# Altium PCB AP2-H.PcbDoc (part 1 of 4)
Units mm, origin at the board's own origin, x right, y up, seen from the top; angles counter-clockwise.
Board outline 380 x 190 mm, 2 copper layers (Top Layer, Bottom Layer); 519 components, 519 nets, 1666 pads, 438 vias.
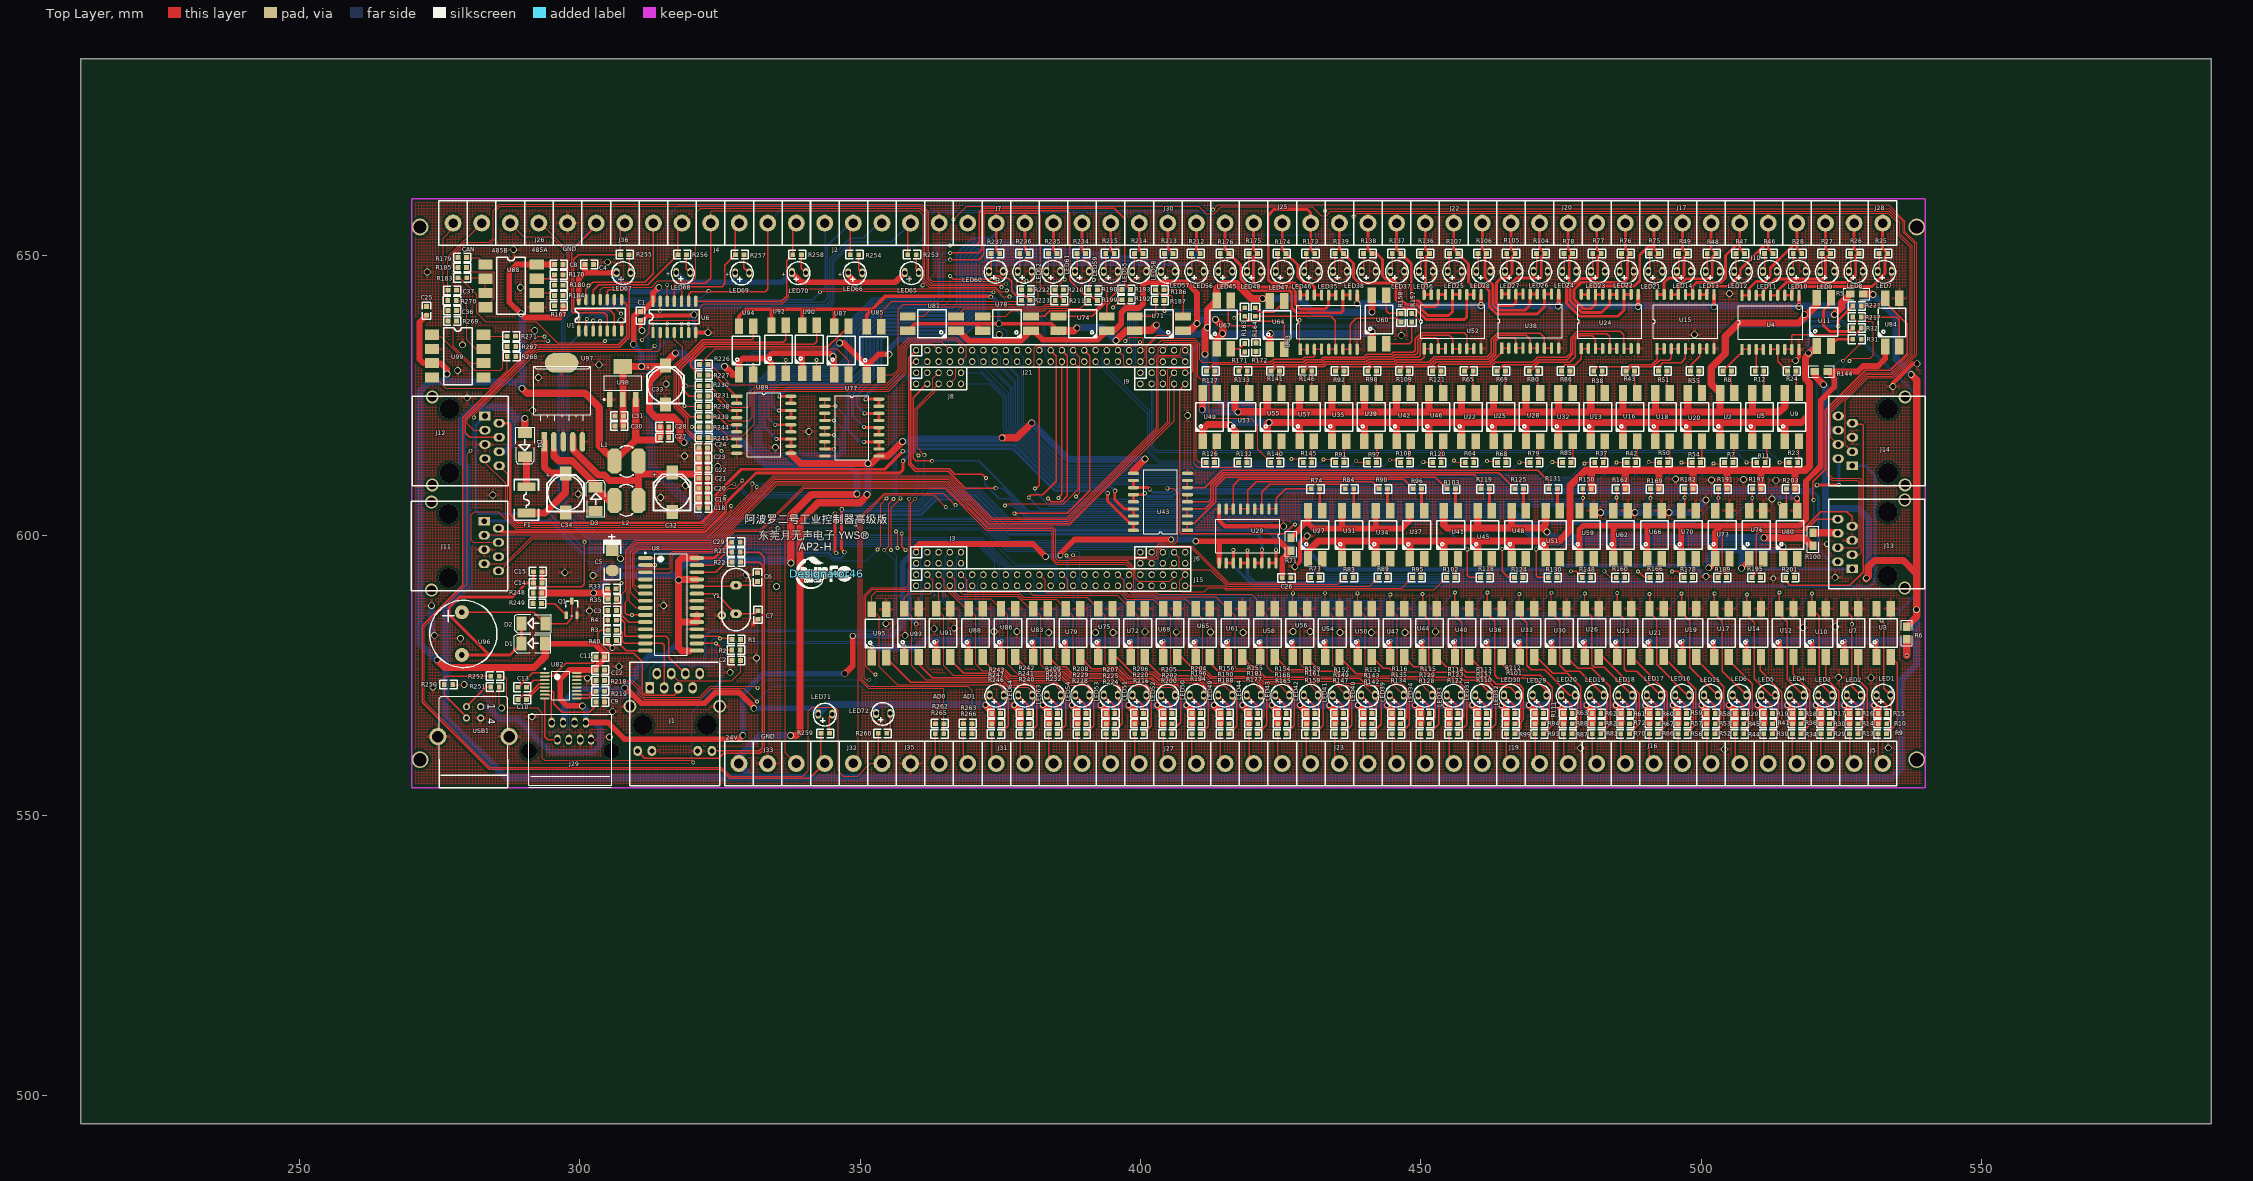
[diagram p0: Top Layer view]
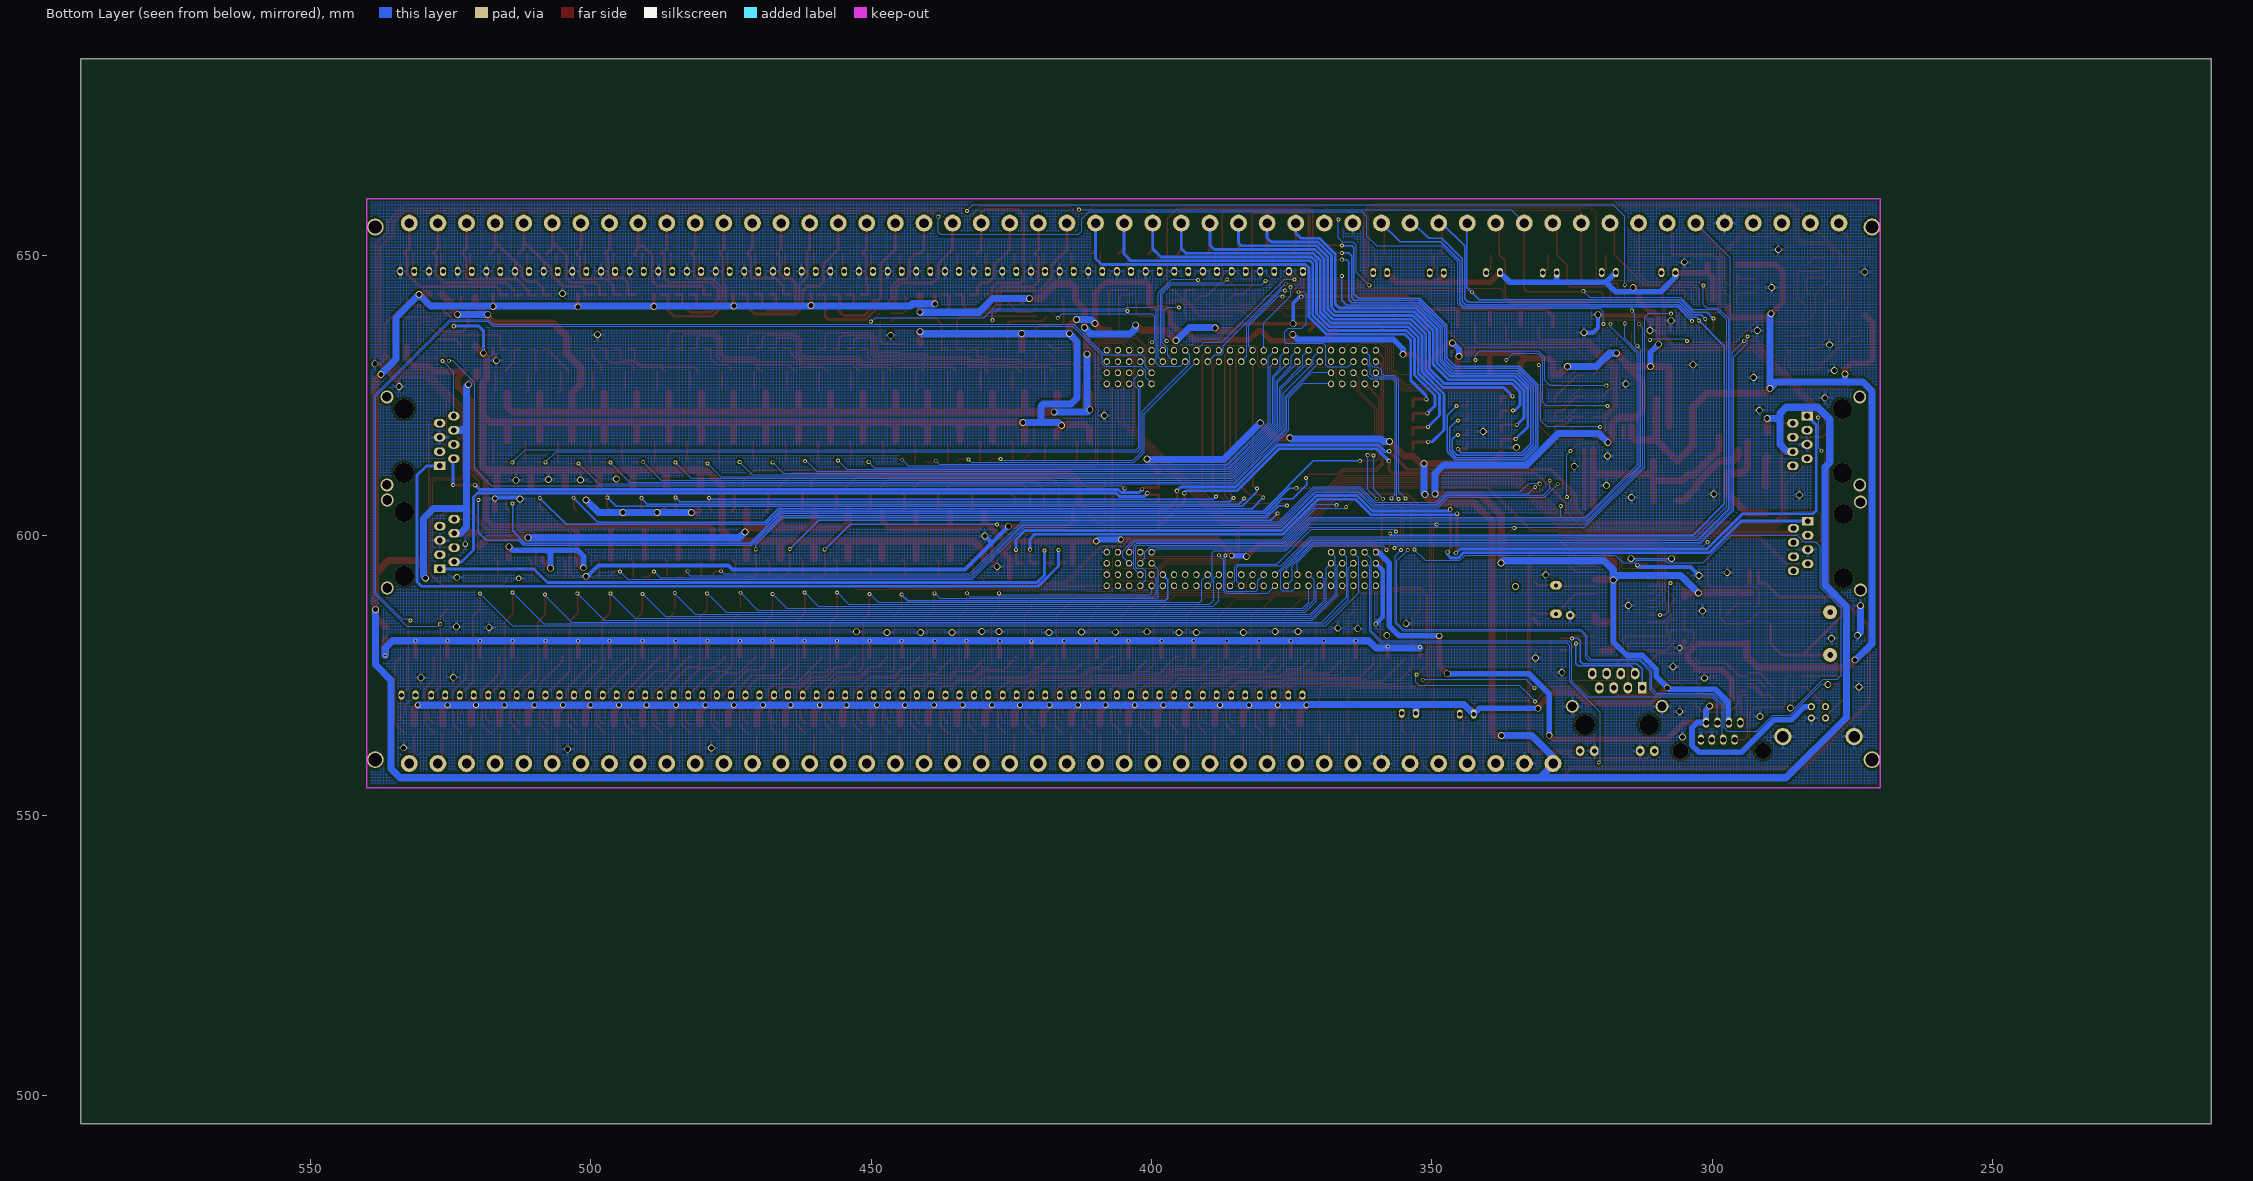
[diagram p1: Bottom Layer view, seen from below]

## Layer stack, top to bottom
Top Layer: signal copper 0.0356
Dielectric: dielectric 0.32, FR-4, Dk 4.8
Bottom Layer: signal copper 0.0356

## Board outline
211,495 591,495 591,685 211,685 211,495

## Design rules (kind name [scope] priority, off if disabled: settings)
Clearance [All] p1: gap=0.16
ComponentClearance [All] p1: gap=0 collisioncheckmode=3 verticalgap=0 showdistances=FALSE
PlaneConnect [All] p1: planeconnectstyle=Relief reliefexpansion=0.508 reliefentries=4 reliefconductorwidth=0.508 reliefairgap=0.508
PolygonConnect [All] p1: connectstyle=Relief reliefconductorwidth=0.508 reliefentries=4 polygonreliefangle="90 Angle" airgapwidth=0.254
RoutingVias [All] p1: holewidth=0.4 width=0.7 viastyle="Through Hole" minholewidth=0.4 minwidth=0.7 maxholewidth=1.2 maxwidth=1.5
SilkToSolderMaskClearance SilkscreenOverComponentPads [IsPad] p1: minsilkscreentomaskgap=0.254 clearancetoexposedcopper=TRUE
SolderMaskExpansion [All] p1: expansion=0.102
Width [All] p1: maxlimit=1.778 minlimit=0.16 preferedwidth=0.254
25 further rules are at their usual default settings.

## Components (designator, comment, footprint, x,y, rotation, side; value= is the part's Value field where it differs from the comment)
C1 "104" 0603 310.82,639.902 r270 top
C2 "103" 0603 328.7,577.647 r180 top
C3 "103" 0603 305,586.624 r0 top
C4 "104" 0603 300.914,648.31 r0 top
C5 "10UF" 胆电容 305.8,597.3 r90 top
C6 "22p" 0603 331.724,591.795 r90 top
C7 "22p" 0603 331.8,586.562 r270 top
C8 "CAP" 0603 297.011,648.31 r180 top
C9 "104" 0603 302.9,570.3 r0 top
C10 "104" 0603 290.5,570.7 r180 top
C11 "104" 0603 302.9,578.283 r0 top
C12 "CAP" 0603 302.9,576 r0 top
C13 "104" 0603 289,572.9 r0 top
C14 "104" 0603 291.77,591.515 r0 top
C15 "104" 0603 291.77,593.515 r0 top
C18 "104" 0603 322.783,604.85 r180 top
C19 "104" 0603 322.788,606.632 r180 top
C20 "104" 0603 322.788,608.405 r180 top
C21 "104" 0603 322.788,610.178 r180 top
C22 "104" 0603 322.788,611.978 r180 top
C23 "104" 0603 322.788,613.776 r180 top
C24 "104" 0603 322.788,615.575 r180 top
C25 "104" 0603 272.669,639.267 r90 top
C26 "104" 0603 425.298,592.43 r0 top
C27 "104" 0603 314.35,617.468 r0 top
C28 "14" 0603 314.35,619.368 r0 top
C29 "104" 0603 327.101,598.78 r0 top
C30 "104" 0603 307.78,619.478 r180 top
C31 "104" 0603 307.78,621.278 r180 top
C32 "220UF/25V" 固态电容 316.509,607.67 r90 top
C33 "470UF" 固态电容 315.29,626.796 r90 top
C34 "680UF/50V" 固态电容 297.485,607.568 r90 top
C36 "30P" 0603 278.003,640.08 r180 top
C37 "30P" 0603 278.003,643.712 r180 top
CAN "CON2" CON2*5 282.499,655.701 r0 top (schematic designator J24)
D1 "5819" 贴片二极管 288.29,580.746 r180 top
D2 "4148" 贴片二极管 288.315,584.327 r180 top
D3 "IN5824" 贴片二极管 302.88,609.878 r90 top
D4 "5817" 贴片二极管 290.17,612.724 r270 top
Designator46 "Comment" fc 344.043,593.166 r0 top
F1 "3A" 自恢复保险丝 290.474,608.686 r270 top
J1 "HR911105A" HR911105A 312.5,572.8 r270 top
J2 "CON4" CON4*5 343.7,655.7 r180 top
J3 "DIP10" DIP2.0-10 360,597 r0 top
J4 "CON4" CON4*5 323.342,655.701 r180 top
J5 "CON6" CON6*5 532.4,559.3 r0 top
J6 "DIP10" DIP2.0-10 400,597 r0 top
J7 "CON6" CON6*5 389.6,655.7 r0 top
J8 "DIP10" DIP2.0-10 360,629 r0 top
J9 "DIP10" DIP2.0-10 400,629 r0 top
J10 "CON4" CON4*5 512,655.7 r0 top
J11 "CON8" 立式RJ45 282.956,602.539 r180 top
J12 "CON8" 立式RJ45 283.083,621.284 r180 top
J13 "CON8" 立式RJ45 526.948,594.004 r0 top
J14 "CON8" 立式RJ45 526.999,612.394 r0 top
J15 "DIP25X2" DIP2.0-50 360,593 r0 top
J16 "CON6" CON6*5 501.8,559.3 r0 top
J17 "CON4" CON4*5 491.6,655.7 r0 top
J19 "CON6" CON6*5 471.2,559.3 r0 top
J20 "CON4" CON4*5 471.2,655.7 r0 top
J21 "DIP25X2" DIP2.0-50 360,633 r0 top
J22 "CON4" CON4*5 450.8,655.7 r0 top
J23 "CON6" CON6*5 440.6,559.3 r0 top
J25 "CON4" CON4*5 430.4,655.7 r0 top
J26 "CON3" CON3*5 287.602,655.702 r180 top
J27 "CON6" CON6*5 410,559.3 r0 top
J28 "CON4" CON4*5 532.4,655.7 r0 top
J29 "CON8" OD-RJ45 295,566.6 r0 top
J30 "CON4" CON4*5 410,655.7 r0 top
J31 "CON2" CON2*5 379.4,559.3 r0 top
J32 "CON4" CON4*5 338.607,559.308 r180 top
J33 "CON2" CON2*5 333.5,559.3 r0 top
J35 "CON3" CON3*5 359,559.3 r180 top
J36 "CON4" CON4*5 318.237,655.701 r0 top
L1 "100UH" SMD-48 309.58,613.278 r0 top
L2 "33UH" SMD-48 307.08,606.178 r180 top
LED1 "LED" LED2.5 531.3,571.5 r180 top
LED2 "LED" LED2.5 526,571.5 r180 top
LED3 "LED" LED2.5 520.906,571.5 r180 top
LED4 "LED" LED2.5 515.81,571.5 r180 top
LED5 "LED" LED2.5 510.713,571.5 r180 top
LED6 "LED" LED2.5 505.616,571.5 r180 top
LED7 "LED" LED2.5 531.5,647.1 r180 top
LED8 "LED" LED2.5 526.387,647.1 r180 top
LED9 "LED" LED2.5 521.274,647.1 r180 top
LED10 "LED" LED2.5 516.161,647.1 r180 top
LED11 "LED" LED2.5 511.048,647.1 r180 top
LED12 "LED" LED2.5 505.935,647.1 r180 top
LED13 "LED" LED2.5 500.823,647.1 r180 top
LED14 "LED" LED2.5 495.71,647.1 r180 top
LED15 "LED" LED2.5 500.519,571.5 r180 top
LED16 "LED" LED2.5 495.423,571.5 r180 top
LED17 "LED" LED2.5 490.326,571.5 r180 top
LED18 "LED" LED2.5 485.229,571.5 r180 top
LED19 "LED" LED2.5 480.132,571.5 r180 top
LED20 "LED" LED2.5 475.035,571.5 r180 top
LED21 "LED" LED2.5 490.597,647.1 r180 top
LED22 "LED" LED2.5 485.484,647.1 r180 top
LED23 "LED" LED2.5 480.371,647.1 r180 top
LED24 "LED" LED2.5 475.258,647.1 r180 top
LED25 "LED" LED2.5 454.806,647.1 r180 top
LED26 "LED" LED2.5 470.145,647.1 r180 top
LED27 "LED" LED2.5 465.032,647.1 r180 top
LED28 "LED" LED2.5 459.919,647.1 r180 top
LED29 "LED" LED2.5 469.939,571.5 r180 top
LED30 "LED" LED2.5 464.842,571.5 r180 top
LED31 "LED" LED2.5 454.648,571.5 r180 top
LED32 "LED" LED2.5 459.745,571.5 r180 top
LED33 "LED" LED2.5 449.552,571.5 r180 top
LED34 "LED" LED2.5 444.455,571.5 r180 top
LED35 "LED" LED2.5 434.355,647.1 r180 top
LED36 "LED" LED2.5 449.694,647.1 r180 top
LED37 "LED" LED2.5 444.581,647.1 r180 top
LED38 "LED" LED2.5 439.468,647.1 r180 top
LED39 "LED" LED2.5 439.358,571.5 r180 top
LED40 "LED" LED2.5 434.261,571.5 r180 top
LED41 "LED" LED2.5 429.165,571.5 r180 top
LED42 "LED" LED2.5 424.068,571.5 r180 top
LED43 "LED" LED2.5 418.971,571.5 r180 top
LED44 "LED" LED2.5 413.874,571.5 r180 top
LED45 "LED" LED2.5 413.903,647.1 r180 top
LED46 "LED" LED2.5 429.242,647.1 r180 top
LED47 "LED" LED2.5 424.129,647.1 r180 top
LED48 "LED" LED2.5 419.016,647.1 r180 top
LED49 "LED" LED2.5 408.777,571.5 r180 top
LED50 "LED" LED2.5 403.681,571.5 r180 top
LED51 "LED" LED2.5 393.487,571.5 r180 top
LED52 "LED" LED2.5 398.584,571.5 r180 top
LED53 "LED" LED2.5 388.39,571.5 r180 top
LED54 "LED" LED2.5 383.294,571.5 r180 top
LED55 "LED" LED2.5 393.452,647.1 r180 top
LED56 "LED" LED2.5 408.79,647.1 r180 top
LED57 "LED" LED2.5 403.677,647.1 r180 top
LED58 "LED" LED2.5 398.565,647.1 r180 top
LED59 "LED" LED2.5 383.226,647.1 r180 top
LED60 "LED" LED2.5 373,647.1 r180 top
LED61 "LED" LED2.5 388.339,647.1 r180 top
LED62 "LED" LED2.5 378.113,647.1 r180 top
LED63 "LED" LED2.5 378.197,571.5 r180 top
LED64 "LED" LED2.5 373.1,571.5 r180 top
LED65 "LED" LED2.5 357.988,646.862 r180 top
LED66 "LED" LED2.5 347.878,646.811 r180 top
LED67 "LED" LED2.5 306.557,646.862 r180 top
LED68 "LED" LED2.5 317.195,646.887 r180 top
LED69 "LED" LED2.5 327.711,646.811 r180 top
LED70 "LED" LED2.5 337.845,646.862 r180 top
LED71 "LED" LED2.5 342.544,568.122 r180 top
LED72 "LED" LED2.5 352.857,568.249 r180 top
Q1 "9013" SOT23 297.612,585.749 r0 top
R1 "50/1%" 0603 328.7,581.447 r180 top
R2 "50/1%" 0603 327.1,579.547 r0 top
R3 "50/1%" 0603 305.024,583.075 r0 top
R4 "50/1%" 0603 306.524,584.849 r180 top
R5 "NC" 0805 526.644,643.026 r0 top
R6 "0" 0805 536.702,581.431 r90 top
R7 "51" 0603 504.163,613 r0 top
R8 "15K" 0603 505.426,629.3 r180 top
R9 "2.4k" 0603 533.1,564.6 r180 top
R10 "4.7k" 0603 531.6,566.4 r0 top
R11 "51" 0603 509.942,613 r0 top
R12 "15K" 0603 511.184,629.3 r180 top
R13 "2.4k" 0603 528.023,564.6 r180 top
R14 "4.7k" 0603 526.5,566.4 r0 top
R15 "160R" 0603 531.6,568.2 r0 top
R16 "160R" 0603 526.5,568.2 r0 top
R17 "160R" 0603 521.4,568.2 r0 top
R18 "160R" 0603 516.3,568.2 r0 top
R19 "160R" 0603 511.2,568.2 r0 top
R20 "160R" 0603 506.1,568.2 r0 top
R21 "1k" 0603 327.101,597.027 r0 top
R22 "1k" 0603 327.127,595.249 r0 top
R23 "51" 0603 515.721,613 r0 top
R24 "15K" 0603 516.942,629.3 r180 top
R25 "2.4K" 0603 533.3,650.3 r180 top
R26 "2.4k" 0603 528.19,650.3 r180 top
R27 "2.4K" 0603 523.081,650.3 r180 top
R28 "2.4K" 0603 517.971,650.3 r180 top
R29 "2.4k" 0603 522.922,564.6 r180 top
R30 "4.7k" 0603 521.4,566.4 r0 top
R31 "51" 0603 528.574,634.975 r180 top
R32 "15K" 0603 527.05,636.956 r0 top
R33 "10K" 0603 304.952,590.474 r0 top
R34 "2.4" 0603 517.822,564.6 r180 top
R35 "10K" 0603 305.029,588.67 r0 top
R36 "4.7k" 0603 516.3,566.4 r0 top
R37 "51" 0603 481.047,613 r0 top
R38 "15K" 0603 482.395,629.3 r180 top
R39 "2.4k" 0603 512.721,564.6 r180 top
R40 "2.7K" 0603 306.524,581.25 r180 top
R41 "4.7k" 0603 511.2,566.4 r0 top
R42 "51" 0603 486.826,613 r0 top
R43 "15K" 0603 488.153,629.3 r180 top
R44 "2.4k" 0603 507.62,564.6 r180 top
R45 "4.7k" 0603 506.1,566.4 r0 top
R46 "2.4K" 0603 512.861,650.3 r180 top
R47 "2.4k" 0603 507.752,650.3 r180 top
R48 "2.4K" 0603 502.642,650.3 r180 top
R49 "2.4K" 0603 497.532,650.3 r180 top
R50 "51" 0603 492.605,613 r0 top
R51 "15K" 0603 493.911,629.3 r180 top
R52 "2.4k" 0603 502.519,564.6 r180 top
R53 "4.7k" 0603 501,566.4 r0 top
R54 "51" 0603 498.384,613 r0 top
R55 "15K" 0603 499.668,629.3 r180 top
R56 "2.4k" 0603 497.419,564.6 r180 top
R57 "4.7k" 0603 495.9,566.4 r0 top
R58 "160R" 0603 501,568.2 r0 top
R59 "160R" 0603 495.9,568.2 r0 top
R60 "160R" 0603 490.8,568.2 r0 top
R61 "160R" 0603 485.7,568.2 r0 top
R62 "160R" 0603 480.6,568.2 r0 top
R63 "160R" 0603 475.5,568.2 r0 top
R64 "51" 0603 457.932,613 r0 top
R65 "15K" 0603 459.363,629.3 r180 top
R66 "2.4k" 0603 492.318,564.6 r180 top
R67 "4.7k" 0603 490.8,566.4 r0 top
R68 "51" 0603 463.711,613 r0 top
R69 "15K" 0603 465.121,629.3 r180 top
R70 "2.4k" 0603 487.217,564.6 r180 top
R71 "0" 0805 426.847,599.567 r270 top
R72 "4.7k" 0603 485.7,566.4 r0 top
R73 "51" 0603 430.4,592.5 r0 top
R74 "15K" 0603 432,608.3 r180 top
R75 "2.4K" 0603 492.423,650.3 r180 top
R76 "2.4k" 0603 487.313,650.3 r180 top
R77 "2.4K" 0603 482.203,650.3 r180 top
R78 "2.4K" 0603 477.094,650.3 r180 top
R79 "51" 0603 469.489,613 r0 top
R80 "15K" 0603 470.879,629.3 r180 top
R81 "2.4k" 0603 482.116,564.6 r180 top
R82 "4.7k" 0603 480.6,566.4 r0 top
R83 "51" 0603 436.452,592.5 r0 top
R84 "15K" 0603 438.053,608.3 r180 top
R85 "51" 0603 475.268,613 r0 top
R86 "15K" 0603 476.637,629.3 r180 top
R87 "2.4k" 0603 477.015,564.6 r180 top
R88 "4.7k" 0603 475.5,566.4 r0 top
R89 "51" 0603 442.503,592.5 r0 top
R90 "15K" 0603 444.107,608.3 r180 top
R91 "51" 0603 434.816,613 r0 top
R92 "15K" 0603 436.332,629.3 r180 top
R93 "2.4k" 0603 471.915,564.6 r180 top
R94 "4.7k" 0603 470.4,566.4 r0 top
R95 "51" 0603 448.555,592.5 r0 top
R96 "15K" 0603 450.16,608.3 r180 top
R97 "51" 0603 440.595,613 r0 top
R98 "15K" 0603 442.089,629.3 r180 top
R99 "2.4k" 0603 466.814,564.6 r180 top
R100 "NC" 0805 519.963,598.17 r90 top
R101 "4.7k" 0603 465.3,566.4 r0 top
R102 "51" 0603 454.607,592.5 r0 top
R103 "15K" 0603 456.213,608.3 r180 top
R104 "2.4K" 0603 472.2,650.3 r180 top
R105 "2.4k" 0603 466.874,650.3 r180 top
R106 "2.4K" 0603 461.765,650.3 r180 top
R107 "2.4K" 0603 456.655,650.3 r180 top
R108 "51" 0603 446.374,613 r0 top
R109 "15K" 0603 447.847,629.3 r180 top
R110 "2.4k" 0603 461.713,564.6 r180 top
R111 "160R" 0603 470.4,568.2 r0 top
R112 "160R" 0603 465.3,568.2 r0 top
R113 "160R" 0603 460.2,568.2 r0 top
R114 "160R" 0603 455.1,568.2 r0 top
R115 "160R" 0603 450,568.2 r0 top
R116 "160R" 0603 444.9,568.2 r0 top
R117 "4.7k" 0603 460.2,566.4 r0 top
R118 "51" 0603 460.659,592.5 r0 top
R119 "15K" 0603 462.267,608.3 r180 top
R120 "51" 0603 452.153,613 r0 top
R121 "15K" 0603 453.605,629.3 r180 top
R122 "2.4k" 0603 456.612,564.6 r180 top
R123 "4.7k" 0603 455.1,566.4 r0 top
R124 "51" 0603 466.71,592.5 r0 top
R125 "15K" 0603 468.32,608.3 r180 top
R126 "51" 0603 411.7,613 r0 top
R127 "15K" 0603 413.3,629.3 r180 top
R128 "2.4k" 0603 451.512,564.6 r180 top
R129 "4.7k" 0603 450,566.4 r0 top
R130 "51" 0603 472.762,592.5 r0 top
R131 "15K" 0603 474.373,608.3 r180 top
R132 "51" 0603 417.479,613 r0 top
R133 "15K" 0603 419.058,629.3 r180 top
R134 "2.4k" 0603 446.411,564.6 r180 top
R135 "4.7k" 0603 444.9,566.4 r0 top
R136 "2.4K" 0603 451.545,650.3 r180 top
R137 "2.4k" 0603 446.435,650.3 r180 top
R138 "2.4K" 0603 441.326,650.3 r180 top
R139 "2.4K" 0603 436.216,650.3 r180 top
R140 "51" 0603 423.258,613 r0 top
R141 "15K" 0603 424.816,629.3 r180 top
R142 "2.4k" 0603 441.31,564.6 r180 top
R143 "4.7k" 0603 439.8,566.4 r0 top
R144 "0" 0805 522.605,629.209 r180 top
R145 "51" 0603 429.037,613 r0 top
R146 "15K" 0603 430.574,629.3 r180 top
R147 "2.4k" 0603 436.209,564.6 r180 top
R148 "2.4k" 0603 480.338,592.5 r180 top
R149 "4.7k" 0603 434.7,566.4 r0 top
R150 "4.7k" 0603 480.427,608.3 r180 top
R151 "160R" 0603 439.8,568.2 r0 top
R152 "160R" 0603 434.7,568.2 r0 top
R153 "160R" 0603 429.6,568.2 r0 top
R154 "160R" 0603 424.5,568.2 r0 top
R155 "160R" 0603 419.4,568.2 r0 top
R156 "160R" 0603 414.3,568.2 r0 top
R157 "51" 0603 448.4,639.6 r270 top
R158 "15K" 0603 446.5,639.6 r270 top
R159 "2.4k" 0603 431.108,564.6 r180 top
R160 "2.4k" 0603 486.39,592.5 r180 top
R161 "4.7k" 0603 429.6,566.4 r0 top
R162 "4.7k" 0603 486.48,608.3 r180 top
R163 "51" 0603 418.6,640.6 r270 top
R164 "15K" 0603 420.5,640.6 r270 top
R165 "2.4" 0603 426.008,564.6 r180 top
R166 "2.4k" 0603 492.441,592.5 r180 top
R167 "100K" 0603 295.504,640.944 r0 top
R168 "4.7k" 0603 424.5,566.4 r0 top
R169 "4.7k" 0603 492.533,608.3 r180 top
R170 "100K" 0603 295.504,646.481 r0 top
R171 "51" 0603 418.6,632.7 r90 top
R172 "15K" 0603 420.6,634.3 r270 top
R173 "2.4K" 0603 431.106,650.3 r180 top
R174 "2.4k" 0603 425.997,650.3 r180 top
R175 "2.4K" 0603 420.887,650.3 r180 top
R176 "2.4K" 0603 415.777,650.3 r180 top
R177 "2.4k" 0603 420.907,564.6 r180 top
R178 "2.4" 0603 498.493,592.5 r180 top
R179 "33" 0603 278.282,649.554 r0 top
R180 "33" 0603 295.478,644.601 r0 top
R181 "4.7k" 0603 419.4,566.4 r0 top
R182 "4.7k" 0603 498.587,608.3 r180 top
R183 "33" 0603 278.308,645.947 r0 top
R184 "33" 0603 295.504,642.772 r0 top
R185 "33" 0603 278.282,647.751 r0 top
R186 "51" 0603 402.7,643.8 r0 top
R187 "15K" 0603 402.7,641.9 r0 top
R188 "2.4k" 0603 415.806,564.6 r180 top
R189 "2.4k" 0603 504.545,592.5 r180 top
R190 "4.7k" 0603 414.3,566.4 r0 top
R191 "4.7k" 0603 504.64,608.3 r180 top
R192 "51" 0603 398.246,642.027 r180 top
R193 "15K" 0603 396.725,643.825 r0 top
R194 "2.4k" 0603 410.705,564.6 r180 top
R195 "2.4k" 0603 510.597,592.5 r180 top
R196 "4.7k" 0603 409.2,566.4 r0 top
R197 "4.7k" 0603 510.693,608.3 r180 top
R198 "51" 0603 390.8,643.8 r0 top
R199 "15K" 0603 390.8,641.9 r0 top
R200 "2.4k" 0603 405.605,564.6 r180 top
R201 "2.4k" 0603 516.648,592.5 r180 top
R202 "4.7k" 0603 404.1,566.4 r0 top
R203 "4.7k" 0603 516.747,608.3 r180 top
R204 "160R" 0603 409.2,568.2 r0 top
R205 "160R" 0603 404.1,568.2 r0 top
R206 "160R" 0603 399,568.2 r0 top
R207 "160R" 0603 393.9,568.2 r0 top
R208 "160R" 0603 388.8,568.2 r0 top
R209 "160R" 0603 383.7,568.2 r0 top
R210 "51" 0603 384.775,643.8 r0 top
R211 "15K" 0603 384.8,641.9 r0 top
R212 "2.4K" 0603 410.668,650.3 r180 top
R213 "2.4k" 0603 405.8,650.3 r180 top
R214 "2.4K" 0603 400.448,650.3 r180 top
R215 "2.4K" 0603 395.339,650.3 r180 top
R216 "2.4k" 0603 400.504,564.6 r180 top
R217 "2.4k" 0603 528.574,638.937 r180 top
R218 "33" 0603 304.424,574.1 r180 top
R219 "33" 0603 304.424,572.2 r180 top
R220 "4.7k" 0603 399,566.4 r0 top
R221 "4.7k" 0603 527.05,640.918 r0 top
R222 "51" 0603 378.8,643.8 r0 top
R223 "15K" 0603 378.8,641.925 r0 top
R224 "2.4k" 0603 395.403,564.6 r180 top
R225 "4.7k" 0603 393.9,566.4 r0 top
R226 "51" 0603 322.885,630.479 r180 top
R227 "15K" 0603 321.34,628.59 r0 top
R228 "2.4k" 0603 390.302,564.6 r180 top
R229 "4.7k" 0603 388.8,566.4 r0 top
R230 "51" 0603 322.859,626.694 r180 top
R231 "15K" 0603 321.335,624.845 r0 top
R232 "2.4k" 0603 385.202,564.6 r180 top
R233 "4.7k" 0603 383.7,566.4 r0 top
R234 "2.4K" 0603 390.229,650.3 r180 top
R235 "2.4k" 0603 385.119,650.3 r180 top
R236 "2.4K" 0603 380.01,650.3 r180 top
R237 "2.4K" 0603 374.9,650.3 r180 top
R238 "51" 0603 322.859,622.996 r180 top
R239 "15K" 0603 321.335,621.147 r0 top
R240 "2.4k" 0603 380.101,564.6 r180 top
R241 "4.7k" 0603 378.6,566.4 r0 top
R242 "160R" 0603 378.6,568.2 r0 top
R243 "160R" 0603 373.5,568.2 r0 top
R244 "51" 0603 322.859,619.298 r180 top
R245 "15K" 0603 321.335,617.449 r0 top
R246 "2.4k" 0603 375,564.6 r180 top
R247 "4.7k" 0603 373.5,566.4 r0 top
R248 "10K" 0603 291.702,589.701 r0 top
R249 "1K" 0603 291.676,587.822 r0 top
R250 "10" 0603 275.819,573.38 r0 top
R251 "10" 0603 285.648,572.973 r180 top
R252 "1.5K" 0603 285.648,574.878 r180 top
R253 "2.4K" 0603 360.02,650.062 r180 top
R254 "2.4k" 0603 349.773,650.062 r180 top
R255 "2.4K" 0603 308.788,650.062 r180 top
R256 "2.4K" 0603 319.034,650.062 r180 top
R257 "2.4K" 0603 329.281,650.062 r180 top
R258 "2.4k" 0603 339.527,650.062 r180 top
R259 "2.4K" 0603 344.526,564.693 r180 top
R260 "2.4K" 0603 354.762,564.693 r180 top
R262 "91K 1%" 0603 363.406,564.6 r0 top
R263 "91K 1%" 0603 368.441,564.6 r0 top
R265 "13K %1" 0603 364.949,566.4 r180 top
R266 "13K %1" 0603 369.987,566.4 r180 top
R267 "390" 0603 288.569,633.705 r180 top
R268 "390" 0603 288.595,631.876 r180 top
R269 "5" 0603 276.504,638.251 r0 top
R270 "5" 0603 276.454,641.883 r0 top
R271 "47k" 0603 287.02,635.508 r0 top
U1 "74HC04" SO-14 303.301,639.115 r90 top
U2 "TLP521-1" PC817 503.395,617.1 r90 top
U3 "TLP521-1" PC817 531.3,578.6 r90 top
U4 "ULN2803" SOL18 507.314,633.171 r90 top
U5 "TLP521-1" PC817 509.163,617.1 r90 top
U6 "74HC04" SO-14 316.535,638.835 r90 top
U7 "TLP521-1" PC817 525.516,578.6 r90 top
U8 "ENC28J60" SOIC28 316.3,587.7 r0 top
U9 "TLP521-1" PC817 514.932,617.1 r90 top
U10 "TLP521-1" PC817 519.732,578.6 r90 top
U11 "TLP521-1" PC817 520.649,634.086 r90 top
U12 "TLP521-1" PC817 513.948,578.6 r90 top
U13 "TLP521-1" PC817 480.321,617.1 r90 top
U14 "TLP521-1" PC817 508.164,578.6 r90 top
U15 "ULN2803" SOL18 492.15,633.298 r90 top
U16 "TLP521-1" PC817 486.089,617.1 r90 top
U17 "TLP521-1" PC817 502.381,578.6 r90 top
U18 "TLP521-1" PC817 491.858,617.1 r90 top
U19 "TLP521-1" PC817 496.597,578.6 r90 top
U20 "TLP521-1" PC817 497.626,617.1 r90 top
U21 "TLP521-1" PC817 490.813,578.6 r90 top
U22 "TLP521-1" PC817 457.247,617.1 r90 top
U23 "TLP521-1" PC817 485.029,578.6 r90 top
U24 "ULN2803" SOL18 478.638,633.324 r90 top
U25 "TLP521-1" PC817 463.016,617.1 r90 top
U26 "TLP521-1" PC817 479.245,578.6 r90 top
U27 "TLP521-1" PC817 429.9,596.1 r90 top
U28 "TLP521-1" PC817 468.784,617.1 r90 top
U29 "ULN2803" SOL18 424.2,604.7 r270 top
U30 "TLP521-1" PC817 473.461,578.6 r90 top
U31 "TLP521-1" PC817 435.953,596.1 r90 top
U32 "TLP521-1" PC817 474.553,617.1 r90 top
U33 "TLP521-1" PC817 467.677,578.6 r90 top
U34 "TLP521-1" PC817 442.007,596.1 r90 top
U35 "TLP521-1" PC817 434.174,617.1 r90 top
U36 "TLP521-1" PC817 461.894,578.6 r90 top
U37 "TLP521-1" PC817 448.06,596.1 r90 top
U38 "ULN2803" SOL18 464.439,633.374 r90 top
U39 "TLP521-1" PC817 439.942,617.1 r90 top
U40 "TLP521-1" PC817 456.11,578.6 r90 top
U41 "TLP521-1" PC817 454.113,596.1 r90 top
U42 "TLP521-1" PC817 445.711,617.1 r90 top
U43 "ULN2803" SOL18 408.4,600.9 r180 top
U44 "TLP521-1" PC817 450.326,578.6 r90 top
U45 "TLP521-1" PC817 460.167,596.1 r90 top
U46 "TLP521-1" PC817 451.479,617.1 r90 top
U47 "TLP521-1" PC817 444.542,578.6 r90 top
U48 "TLP521-1" PC817 466.22,596.1 r90 top
U49 "TLP521-1" PC817 411.1,617.1 r90 top
U50 "TLP521-1" PC817 438.758,578.6 r90 top
U51 "TLP521-1" PC817 472.273,596.1 r90 top
U52 "ULN2803" SOL18 450.6,633.3 r90 top
U53 "TLP521-1" PC817 416.868,617.1 r90 top
U54 "TLP521-1" PC817 432.974,578.6 r90 top
U55 "TLP521-1" PC817 422.637,617.1 r90 top
U56 "TLP521-1" PC817 427.19,578.6 r90 top
U57 "TLP521-1" PC817 428.405,617.1 r90 top
U58 "TLP521-1" PC817 421.406,578.6 r90 top
U59 "TLP521-1" PC817 478.327,596.1 r90 top
U60 "TLP521-1" PC817 441.3,634.5 r90 top
U61 "TLP521-1" PC817 415.623,578.6 r90 top
U62 "TLP521-1" PC817 484.38,596.1 r90 top
U63 "ULN2803" SOL18 428.5,633.2 r90 top
U64 "TLP521-1" PC817 423.1,633.5 r90 top
U65 "TLP521-1" PC817 409.839,578.6 r90 top
U66 "TLP521-1" PC817 490.433,596.1 r90 top
U67 "TLP521-1" PC817 413.6,633.6 r90 top
U68 "SP485" SOP8 283.185,648.31 r0 top
U69 "TLP521-1" PC817 404.055,578.6 r90 top
U70 "TLP521-1" PC817 496.487,596.1 r90 top
U71 "TLP521-1" PC817 407.3,636.5 r180 top
U72 "TLP521-1" PC817 398.271,578.6 r90 top
U73 "TLP521-1" PC817 502.54,596.1 r90 top
U74 "TLP521-1" PC817 393.7,636.5 r180 top
U75 "TLP521-1" PC817 392.487,578.6 r90 top
U76 "TLP521-1" PC817 508.593,596.1 r90 top
U77 "ULN2803" SOL18 343.7,624.3 r0 top
U78 "TLP521-1" PC817 380.2,636.5 r180 top
U79 "TLP521-1" PC817 386.703,578.6 r90 top
U80 "TLP521-1" PC817 514.647,596.1 r90 top
U81 "TLP521-1" PC817 366.8,636.5 r180 top
U82 "SP3232" TSSOP16 296.6,573.2 r0 top
U83 "TLP521-1" PC817 380.919,578.6 r90 top
U84 "TLP521-1" PC817 532.841,633.984 r90 top
U85 "TLP521-1" PC817 351.2,628.9 r90 top
U86 "TLP521-1" PC817 375.135,578.6 r90 top
U87 "TLP521-1" PC817 345.4,629 r90 top
U88 "TLP521-1" PC817 369.352,578.6 r90 top
U89 "ULN2803" SOL18 328,624.8 r0 top
U90 "TLP521-1" PC817 339.7,629.2 r90 top
U91 "TLP521-1" PC817 363.568,578.6 r90 top
U92 "TLP521-1" PC817 334.2,629.2 r90 top
U93 "TLP521-1" PC817 357.9,578.6 r90 top
U94 "TLP521-1" PC817 328.4,629 r90 top
U95 "TLP521-1" PC817 352.1,578.5 r90 top
U96 "蜂鸣器" 蜂鸣器 278.968,582.473 r90 top
U97 "LM2596" TO-263-5 293.7,617.372 r0 top
U98 "SP1117" SOT223 307.68,627.178 r90 top
U99 "SN65HVD230" SOP8 273.685,635.787 r0 top
USB1 "USB" USB-B3 282.321,569.443 r270 top
Y1 "XTAL" 晶振 327.863,588.543 r90 top

## Footprints (in the part's own frame and the unit in brackets; to place one, negate y for a bottom-side part, rotate by r counter-clockwise, add the part's x,y. Pads: shape width x height; smd on the part's side, far side on the other; paste and mask are expansions set on the pad)
0603 [mil]
  rect 34x34 smd: 1(0,0) 2(60,0)
  silkscreen extent -30,-30 90,30
0805 [mil]
  rect 60x50 smd: 1(0,0) 2(90,0)
  silkscreen extent -45,-40 135,40
CON2*5 [mm]
  round 3 hole 1.7: 1(0,0) 2(-5.1,0)
  silkscreen extent -7.65,-4 2.55,4
CON3*5 [mm]
  round 3 hole 1.7: 1(0,0) 2(-5.1,0) 3(-10.2,0)
  silkscreen extent -12.75,-4 2.55,4
CON4*5 [mm]
  round 3 hole 1.7: 1(0,0) 2(-5.1,0) 3(-10.2,0) 4(-15.3,0)
  silkscreen extent -17.85,-4 2.55,4
CON6*5 [mm]
  round 3 hole 1.7: 1(0,0) 2(-5.1,0) 3(-10.2,0) 4(-15.3,0) 5(-20.4,0) 6(-25.5,0)
  silkscreen extent -28.05,-4 2.55,4
DIP2.0-10 [mm]
  oval 1.1x1.2 hole 0.8: 1(0,0) 2(0,-2) 3(2,0) 4(2,-2) 5(4,0) 6(4,-2) 7(6,0) 8(6,-2) 9(8,0) 10(8,-2)
  silkscreen extent -1,-3 9,1
DIP2.0-50 [mm]
  oval 1.1x1.2 hole 0.8: 1(0,0) 2(0,-2) 3(2,0) 4(2,-2) 5(4,0) 6(4,-2) 7(6,0) 8(6,-2) 9(8,0) 10(8,-2) 11(10,0) 12(10,-2) 13(12,0) 14(12,-2) 15(14,0) 16(14,-2) 17(16,0) 18(16,-2) 19(18,0) 20(18,-2) 21(20,0) 22(20,-2) 23(22,0) 24(22,-2) 25(24,0) 26(24,-2) 27(26,0) 28(26,-2) 29(28,0) 30(28,-2) 31(30,0) 32(30,-2) 33(32,0) 34(32,-2) 35(34,0) 36(34,-2) 37(36,0) 38(36,-2) 39(38,0) 40(38,-2) 41(40,0) 42(40,-2) 43(42,0) 44(42,-2) 45(44,0) 46(44,-2) 47(46,0) 48(46,-2) 49(48,0) 50(48,-2)
  silkscreen extent -1,-3 49,1
fc [mm]
  silkscreen extent -5.53,-2.62 4.36,3
HR911105A [mil]
  rect 80x60 hole 40: 1(0,0)
  oval 80x60 hole 40: 2(-100,50) 3(0,100) 4(-100,150) 5(0,200) 6(-100,250) 7(0,300) 8(-100,350)
  oval 72x60 hole 36: 9(442.91,-85.63) 10(442.91,14) 11(442.91,335.87) 12(442.91,436)
  round 90 hole 65: 13(129.92,490.16) 13(129.92,-139.76)
  silkscreen extent -179,-140 687,490
LED2.5 [mil]
  oct 40x63 hole 32: A(0,0)
  oval 40x63 hole 32: K(-98.42,0)
  silkscreen extent -126,-76 34,84
OD-RJ45 [mm]
  oval 1.1x1.8 hole 1: 1(0,0) 2(1.016,-3.048) 3(2.032,0) 4(3.048,-3.048) 5(4.064,0) 6(5.08,-3.048) 7(6.096,0) 8(7.012,-3.048)
  silkscreen extent -4.1,-11.53 10.67,1.52
PC817 [mm]
  rect 2.8x1.5 smd: 1(-0.3,0) 2(-0.3,-2.54) 3(8.3,-2.54) 4(8.3,0)
  silkscreen extent 1.46,-3.72 6.53,1.22
SMD-48 [mm]
  oct 2.5x4.5 smd: 1(-3.37,-0.03) 2(0.92,-0.03)
  silkscreen extent -2.43,-2.9 0.07,2.75
SO-14 [mil]
  oval 80x24 smd: 1(-104.65,136.53) 2(-104.65,86.53) 3(-104.65,36.53) 4(-104.65,-13.47) 5(-104.65,-63.47) 6(-104.65,-113.47) 7(-104.65,-163.47) 8(115.35,-163.47) 9(115.35,-113.47) 10(115.35,-63.47) 11(115.35,-13.47) 12(115.35,36.53) 13(115.35,86.53) 14(115.35,136.53)
  silkscreen extent -45,-188 55,162
SOIC28 [mm] "28-Pin Small Outline Integrated Circuit 1.27 mm Pitch, IPC Low Density"
  oval 2.6x0.7 smd: 1(-4.6,8.255) 2(-4.6,6.985) 3(-4.6,5.715) 4(-4.6,4.445) 5(-4.6,3.175) 6(-4.6,1.905) 7(-4.6,0.635) 8(-4.6,-0.635) 9(-4.6,-1.905) 10(-4.6,-3.175) 11(-4.6,-4.445) 12(-4.6,-5.715) 13(-4.6,-6.985) 14(-4.6,-8.255) 15(4.6,-8.255) 16(4.6,-6.985) 17(4.6,-5.715) 18(4.6,-4.445) 19(4.6,-3.175) 20(4.6,-1.905) 21(4.6,-0.635) 22(4.6,0.635) 23(4.6,1.905) 24(4.6,3.175) 25(4.6,4.445) 26(4.6,5.715) 27(4.6,6.985) 28(4.6,8.255)
  silkscreen extent -4.72,-9.05 2.9,9.28, body extent -3.8,-9.06 3.8,9.06, height 2.65
SOL18 [mm]
  rect 2x0.6 smd: 1(0,0)
  oval 2x0.6 smd: 2(0,-1.27) 3(0,-2.54) 4(0,-3.81) 5(0,-5.08) 6(0,-6.35) 7(0,-7.62) 8(0,-8.89) 9(0,-10.16) 10(9.65,-10.16) 11(9.65,-8.89) 12(9.65,-7.62) 13(9.65,-6.35) 14(9.65,-5.08) 15(9.65,-3.81) 16(9.65,-2.54) 17(9.65,-1.27) 18(9.65,0)
  silkscreen extent 1.84,-10.79 7.82,0.64
SOP8 [mm]
  rect 2.5x1.8 smd: 1(0,0) 2(0,-2.54) 3(0,-5.08) 4(0,-7.62) 5(9.144,-7.62) 6(9.144,-5.08) 7(9.144,-2.54) 8(9.144,0)
  silkscreen extent 2.03,-8.89 7.11,1.27
SOT23 [mm]
  rect 0.6x1.27 smd: 1(0,0) 2(1.905,0) 3(0.965,2.54)
  silkscreen extent -0.11,-0.13 2.04,2.56
SOT223 [mm] "SOT223, 4-Leads, Body 6.5x3.5mm, Pitch 2.3mm, Lead Span 7mm, IPC Low Density"
  rect 2.7x1 smd: 1(-2.95,2.3) 2(-2.95,0) 3(-2.95,-2.3)
  rect 2.7x3.3 smd: 4(2.95,0)
  silkscreen extent -3.07,-3.35 1.3,3.47, body extent -1.85,-3.35 1.85,3.35, height 1.7
TO-263-5 [mm]
  rect 1x3.5 smd: 1(0,-0.691)
  oval 1x3.5 smd: 2(1.693,-0.691) 3(3.387,-0.691) 4(5.08,-0.691) 5(6.773,-0.691)
  oval 6x3.5 smd: 6(3.064,13.384)
  silkscreen extent -1.93,3.08 8.23,12.8
TSSOP16 [mm] "TSOP, 16-Leads, Body 5x4.4mm, Pitch 0.65mm, IPC Medium Density"
  oval 1.7x0.35 smd: 1(-2.85,2.275) 2(-2.85,1.625) 3(-2.85,0.975) 4(-2.85,0.325) 5(-2.85,-0.325) 6(-2.85,-0.975) 7(-2.85,-1.625) 8(-2.85,-2.275) 9(2.85,-2.275) 10(2.85,-1.625) 11(2.85,-0.975) 12(2.85,-0.325) 13(2.85,0.325) 14(2.85,0.975) 15(2.85,1.625) 16(2.85,2.275)
  silkscreen extent -2.97,-2.55 1.6,3.12, body extent -2.25,-2.55 2.25,2.55, height 1.1
USB-B3 [mil]
  round 50 hole 30: 1(0,0) 2(0,-100) 3(80,-100) 4(80,0)
  round 120 hole 80: 5(210,200) 6(210,-300)
  silkscreen extent -73,-290 570,190
固态电容 [mm]
  rect 2.5x2 smd: 1(3.5,0) 2(-3.5,0)
  silkscreen extent -3.27,-3.27 3.22,3.33
晶振 [mil]
  oval 62x82 hole 28: 1(-100,0) 2(100,0)
  silkscreen extent -219,-100 219,100
立式RJ45 [mil]
  rect 80x60 hole 40: 1(0,0)
  oval 80x60 hole 40: 2(-100,50) 3(0,100) 4(-100,150) 5(0,200) 6(-100,250) 7(0,300) 8(-100,350)
  silkscreen extent -165,-140 512,490
胆电容 [mm]
  rect 2x2.2 smd: 1(-0.019,0)
  oct 2x2.2 smd: 2(-3.575,0)
  silkscreen extent -5.27,-1.5 2.92,1.5
自恢复保险丝 [mil]
  rect 60x125 smd: 1(0,0) 2(185,0)
  silkscreen extent -50,-85 235,85
蜂鸣器 [mm]
  round 2.5 hole 1: 1(3.81,0) 2(-3.81,0)
  silkscreen extent -6.06,-6.25 5.94,5.75
贴片二极管 [mm]
  rect 1.8x2.5 smd: A(-5.55,0.075) K(-1.3,0.075)
  silkscreen extent -6.58,-1.61 -0.05,1.73

## Part data
C1 C2 C3 C4 C9 C10 C11 C13 C14 C15 C18 C19 C20 C21 C22 C23 C24 C25 C26 C27 C28 C29 C30 C31: library part CAP, "Capacitor"
C5 C32 C33 C34: library part "CAPACITOR POL", "Capacitor"
C6 C7: library part Cap, "Capacitor"
C8 C12: "Capacitor"
C36 C37: library part CAP
D1 D2 D4: library part 二极管
D3: library part 肖特基二极管
F1: library part "Fuse 1", "Fuse"
J3 J6 J8 J9: library part DIP5X2
L1 L2: library part L1
Q1: library part NPN
R1 R2 R3 R4 R33 R35 R40 R167 R170 R179 R180 R183 R184 R185 R218 R219 R248 R249 R267 R268 R269 R270 R271: library part RES2
R5 R6 R7 R8 R9 R10 R11 R12 R13 R14 R15 R16 R17 R18 R19 R20 R21 R22 R23 R24 R25 R26 R27 R28 R29 R30 R31 R32 R34 R36 R37 R38 R39 R41 R42 R43 R44 R45 R46 R47 R48 R49 R50 R51 R52 R53 R54 R55 R56 R57 R58 R59 R60 R61 R62 R63 R64 R65 R66 R67 R68 R69 R70 R71 R72 R73 R74 R75 R76 R77 R78 R79 R80 R81 R82 R83 R84 R85 R86 R87 R88 R89 R90 R91 R92 R93 R94 R95 R96 R97 R98 R99 R100 R101 R102 R103 R104 R105 R106 R107 R108 R109 R110 R111 R112 R113 R114 R115 R116 R117 R118 R119 R120 R121 R122 R123 R124 R125 R126 R127 R128 R129 R130 R131 R132 R133 R134 R135 R136 R137 R138 R139 R140 R141 R142 R143 R144 R145 R146 R147 R148 R149 R150 R151 R152 R153 R154 R155 R156 R157 R158 R159 R160 R161 R162 R163 R164 R165 R166 R168 R169 R171 R172 R173 R174 R175 R176 R177 R178 R181 R182 R186 R187 R188 R189 R190 R191 R192 R193 R194 R195 R196 R197 R198 R199 R200 R201 R202 R203 R204 R205 R206 R207 R208 R209 R210 R211 R212 R213 R214 R215 R216 R217 R220 R221 R222 R223 R224 R225 R226 R227 R228 R229 R230 R231 R232 R233 R234 R235 R236 R237 R238 R239 R240 R241 R242 R243 R244 R245 R246 R247 R253 R254 R255 R256 R257 R258 R259 R260 R262 R263 R265 R266: library part Res2, "Resistor"
R250 R251 R252: library part R
U2 U3 U5 U7 U9 U10 U11 U12 U13 U14 U16 U17 U18 U19 U20 U21 U22 U23 U25 U26 U27 U28 U30 U31 U32 U33 U34 U35 U36 U37 U39 U40 U41 U42 U44 U45 U46 U47 U48 U49 U50 U51 U53 U54 U55 U56 U57 U58 U59 U60 U61 U62 U64 U65 U66 U67 U69 U70 U71 U72 U73 U74 U75 U76 U78 U79 U80 U81 U83 U84 U85 U86 U87 U88 U90 U91 U92 U93 U94 U95: "Single NPN PhotoTransistor OptoCoupler."
U82: library part SP3232EEA
USB1: library part "HEADER 3X2"
Y1: "Crystal Oscillator"

## Free pads (board coordinates)
  round 1.524 hole 0.762: 0(325.349,585.724)
  round 3 hole 2.4: 1(538.5,560) 2(271.5,560) 3(271.5,655) 4(538.5,655)

## Via types
v1: diameter 0.7, hole 0.4, Top Layer to Bottom Layer, 204 vias
v2: diameter 1.2, hole 0.9, Top Layer to Bottom Layer, 160 vias
v3: diameter 1, hole 0.7, Top Layer to Bottom Layer, 38 vias
v4: diameter 0.8, hole 0.5, Top Layer to Bottom Layer, 14 vias
v5: diameter 3.556, hole 3.556, Top Layer to Bottom Layer, 10 vias
v6: diameter 2.3, hole 1.7, Top Layer to Bottom Layer, 8 vias
v7: diameter 1.1, hole 0.8, Top Layer to Bottom Layer, 2 vias
v8: diameter 2.8, hole 2.8, Top Layer to Bottom Layer, 2 vias

## Nets (pads, with @x,y where several pads share a name; then routed paths per layer and width w, separated by ;. In a path a pad name is that pad's centre, name@x,y a point inside that pad or via, vN(x,y) a via of type N, cw(c..) or ccw(c..) an arc to the next point about the centre after c; other vN are vias at no path point)
485A: R167.1 R184.1 U68.6 | length 5.3
  Top Layer w0.203: U68.6@292.329,643.23 295.123,643.23 295.58,642.772 295.58,640.969 R167.1@295.554,640.944
485B: R170.1 R180.1 U68.7 | length 5.4
  Top Layer w0.254: U68.7@292.329,645.77 294.843,645.77 R170.1@295.529,646.455 ; R180.1@295.529,644.601 R170.1@295.529,646.455 ; R170.1@295.554,646.481 R170.1@295.529,646.455
+3.3V: C1.1 C4.1 C29.1 C30.1 C31.1 C33.1 J29.3 LED65.A LED66.A LED67.A LED68.A LED69.A LED70.A LED71.A LED72.A R10.1 R14.1 R15.1 R16.1 R17.1 R18.1 R19.1 R20.1 R30.1 R33.1 R35.1 R36.1 R41.1 R45.1 R53.1 R57.1 R58.1 R59.1 R60.1 R61.1 R62.1 R63.1 R67.1 R72.1 R82.1 R88.1 R94.1 R101.1 R111.1 R112.1 R113.1 R114.1 R115.1 R116.1 R117.1 R123.1 R129.1 R135.1 R143.1 R149.1 R150.1 R151.1 R152.1 R153.1 R154.1 R155.1 R156.1 R161.1 R162.1 R168.1 R169.1 R181.1 R182.1 R190.1 R191.1 R196.1 R197.1 R202.1 R203.1 R204.1 R205.1 R206.1 R207.1 R208.1 R209.1 R220.1 R221.1 R225.1 R229.1 R233.1 R241.1 R242.1 R243.1 R247.1 R248.2 U1.14 U2.1 U5.1 U6.14 U8.15 U8.19 U8.20 U8.25 U8.28 U9.1 U11.1 U13.1 U16.1 U18.1 U20.1 U22.1 U25.1 U27.1 U28.1 U31.1 U32.1 U34.1 U35.1 U37.1 U39.1 U41.1 U42.1 U45.1 U46.1 U48.1 U49.1 U51.1 U53.1 U55.1 U57.1 U60.1 U64.1 U67.1 U71.1 U74.1 U78.1 U81.1 U85.1 U87.1 U90.1 U92.1 U94.1 U98.2 U98.4 | length 1228.1
  Top Layer w0.508: U8.28@320.9,595.955 324.023,595.955 326.847,598.78 C29.1@327.101,598.78 ; 371.036,634.688 371.069,634.721 ; v4@524.459,637.54 524.459,638.327 R221.1@527.05,640.918
  Top Layer w1.016: U1.14@299.833,642.045 299.833,645.858 300.914,646.938 C4.1@300.914,648.31 ; 300.838,646.862 LED67.A@306.557,646.862 ; v2(308.026,572.795) 308.216,572.795 310.986,570.026 322.275,570.026 324.221,571.971 328.433,571.971 v2@331.038,569.366 ; v2@309.608,634.086 309.608,638.975 310.536,639.902 C1.1@310.82,639.902 311.204,639.902 U6.14@313.067,641.765 313.067,643.216 v2(314.096,644.246) ; U94.1@328.4,628.7 328.4,630.863 329.075,631.538 333.357,631.538 ; U92.1@334.2,628.9 334.2,630.695 333.357,631.538 ; LED70.A@337.845,646.862 339.573,645.135 349.174,645.135 ; U90.1@339.7,628.9 339.7,632.427 ; 344.635,632.478 334.297,632.478 333.357,631.538 ; U87.1@345.4,628.7 v2@345.4,631.713 ; v2(346.354,634.314) 347.091,634.314 351.2,630.205 ; LED66.A@347.878,646.811 347.878,646.43 349.174,645.135 ; U85.1@351.2,628.6 351.2,630.205 ; v2(355.168,632.282) 353.277,632.282 351.2,630.205 ; LED65.A@357.988,646.862 356.26,645.135 349.174,645.135 ; U81.1@367.1,636.5 367.613,636.5 369.392,634.721 371.069,634.721 374.752,634.721 ; v2(374.828,635.838) 374.828,634.797 374.752,634.721 ; v2(410.083,637.794) 410.083,643.23 408.153,645.16 401.041,645.16 400.482,644.601 400.482,641.274 399.745,640.537 397.403,640.537 396.57,639.705 396.57,637.743 395.327,636.5 U74.1@394,636.5 392.41,634.91 382.549,634.91 380.959,636.5 U78.1@380.5,636.5 378.721,634.721 374.752,634.721
  Top Layer w1.27: R248.2@293.226,589.701 293.244,589.719 v2(302.489,589.719) 304.546,589.719 ; R35.1@304.952,589.026 R33.1@304.952,590.042 ; C30.1@307.68,619.478 U98.2@307.68,624.228 U98.4@307.68,630.128 v2(311.023,630.128) C33.1@315.122,630.128 ; v2(317.043,632.485) 315.29,630.733 C33.1@315.29,630.296 C33.1@315.122,630.128 ; v2(318.618,616.534) 317.856,617.296 317.856,619.938 316.738,621.055 313.563,621.055 312.42,622.198 312.42,627.426 C33.1@315.122,630.128 ; 319.6,579.4 318.2,579.4 317.6,580 317.6,585 ; U8.20@320.9,585.795 U8.19@320.9,584.525 318.075,584.525 317.6,585 ; U8.25@320.9,592.145 317.645,592.145 v2@317.6,592.1 ; U8.28@320.9,595.955 318.255,595.955 317.6,595.3 v2@317.6,592.1 ; v2(325.831,630.149) 327.28,628.7 U94.1@328.4,628.7 ; v2@337.642,595.046 337.642,603.58 341.376,607.314 v2@349.428,607.314 ; v3(372.4,569.7) 373.5,568.6 R247.1@373.5,566.4 ; v3(377.5,569.7) 378.6,568.6 R242.1@378.6,568.2 R241.1@378.6,566.4 ; v3(382.6,569.7) 383.7,568.6 R209.1@383.7,568.2 R233.1@383.7,566.4 ; v3(387.8,569.7) 388.8,568.7 R208.1@388.8,568.2 R229.1@388.8,566.4 ; v3(392.9,569.7) 393.9,568.7 R207.1@393.9,568.2 R225.1@393.9,566.4 ; v3(397.9,569.7) 399,568.6 R206.1@399,568.2 R220.1@399,566.4 ; v3(403,569.7) 404.1,568.6 R205.1@404.1,568.2 R202.1@404.1,566.4 ; U71.1@407.6,636.5 408.789,636.5 v2(410.083,637.794) ; v3(408.2,569.7) 409.2,568.7 R204.1@409.2,568.2 R196.1@409.2,566.4 ; U49.1@411.1,616.8 411.1,618.897 411.963,619.76 415.798,619.76 416.966,618.592 U53.1@416.966,617.601 ; v3(413.1,569.7) 414.3,568.5 R156.1@414.3,568.2 R190.1@414.3,566.4 ; v2(413.417,638.519) 414.68,637.255 v2(414.68,635.965) 413.6,634.885 U67.1@413.6,633.3 ; v3(418.2,569.7) 419.4,568.5 R155.1@419.4,568.2 R181.1@419.4,566.4 ; U55.1@422.637,616.8 422.637,619.963 422.774,620.1 451.3,620.1 ; U64.1@423.1,633.2 v2@423.1,635.991 ; v3(423.5,569.7) 424.5,568.7 R154.1@424.5,568.2 R168.1@424.5,566.4 ; U57.1@428.405,616.8 428.405,619.595 ; v3(428.5,569.7) 429.6,568.6 R153.1@429.6,568.2 R161.1@429.6,566.4 ; U27.1@429.9,595.8 429.9,597.184 431.716,599 471.1,599 ; v3(433.7,569.7) 434.7,568.7 R152.1@434.7,568.2 R149.1@434.7,566.4 ; U35.1@434.174,616.8 434.174,619.826 ; U31.1@435.953,595.8 435.953,598.953 ; v3(438.8,569.7) 439.8,568.7 R151.1@439.8,568.2 R143.1@439.8,566.4 ; U39.1@439.942,616.8 439.942,619.942 ; U60.1@441.3,634.2 v2@441.3,636.219 ; U34.1@442.007,595.8 442.007,598.807 ; v3(444,569.7) 444.9,568.8 R116.1@444.9,568.2 R135.1@444.9,566.4 ; 445.5,620 445.711,619.789 U42.1@445.711,616.8 ; U37.1@448.06,595.8 448.06,598.86 ; v3(449,569.7) 450,568.7 R115.1@450,568.2 R129.1@450,566.4 ; U46.1@451.479,616.8 451.479,619.921 451.3,620.1 ; U41.1@454.113,595.8 454.113,598.987 ; v3(454.4,569.7) 455.1,569 R114.1@455.1,568.2 R123.1@455.1,566.4 ; U22.1@457.247,616.8 457.247,620.047 457.3,620.1 ; v3(459.2,569.7) 460.2,568.7 R113.1@460.2,568.2 R117.1@460.2,566.4 ; U45.1@460.167,595.8 460.167,598.933 ; U25.1@463.016,616.8 463.016,620.016 463.1,620.1 ; v3(464.4,569.7) 465.3,568.8 R112.1@465.3,568.2 R101.1@465.3,566.4 ; U48.1@466.22,595.8 466.22,598.92 ; U28.1@468.784,616.8 468.784,620.016 468.8,620.032 ; v3(469.3,569.7) 470.4,568.6 R111.1@470.4,568.2 R94.1@470.4,566.4 ; U51.1@472.273,595.8 472.273,597.827 471.1,599 ; v3(474.5,569.7) 475.5,568.7 R63.1@475.5,568.2 R88.1@475.5,566.4 ; U32.1@474.553,616.8 474.553,619.853 474.8,620.1 ; v3(479.6,569.7) 480.6,568.7 R62.1@480.6,568.2 R82.1@480.6,566.4 ; U13.1@480.321,616.8 480.321,619.979 480.2,620.1 ; R150.1@480.427,608.3 480.427,611.607 ; v3(484.8,569.7) 485.7,568.8 R61.1@485.7,568.2 R72.1@485.7,566.4 ; U16.1@486.089,616.8 486.089,619.989 486.2,620.1 ; R162.1@486.48,608.3 486.48,611.607 ; v3(490.1,569.7) 490.8,569 R60.1@490.8,568.2 R67.1@490.8,566.4 ; U18.1@491.858,616.8 491.858,620.058 491.9,620.1 ; R169.1@492.533,608.3 492.533,611.607 ; v3(495,569.7) 495.9,568.8 R59.1@495.9,568.2 R57.1@495.9,566.4 ; U20.1@497.626,616.8 497.626,619.974 497.5,620.1 ; R182.1@498.587,608.3 498.587,611.607 ; v3(500.1,569.7) 501,568.8 R58.1@501,568.2 R53.1@501,566.4 ; U2.1@503.395,616.8 503.395,619.905 503.2,620.1 ; R191.1@504.64,608.3 504.64,611.607 ; v3(505,569.7) 506.1,568.6 R20.1@506.1,568.2 R45.1@506.1,566.4 ; U5.1@509.163,616.8 509.163,619.863 509.4,620.1 ; v3(510.1,569.7) 511.2,568.6 R19.1@511.2,568.2 R41.1@511.2,566.4 ; R197.1@510.693,608.3 510.693,611.607 ; U9.1@514.932,616.8 514.932,619.868 514.7,620.1 ; v3(515.4,569.7) 516.3,568.8 R18.1@516.3,568.2 R36.1@516.3,566.4 ; R203.1@516.747,608.3 516.747,611.607 ; v3(520.5,569.7) 521.4,568.8 R17.1@521.4,568.2 R30.1@521.4,566.4 ; U11.1@520.649,633.786 518.617,631.754 518.617,627.863 519.354,627.126 519.354,621.522 ; v3(525.6,569.7) 526.5,568.8 R16.1@526.5,568.2 R14.1@526.5,566.4 ; v3(530.9,569.7) 531.6,569 R15.1@531.6,568.2 R10.1@531.6,566.4 ; 317.6,585 v2@317.6,592.1 ; 451.3,620.1 457.3,620.1 ; 457.3,620.1 463.1,620.1 ; 463.1,620.1 474.8,620.1 ; 471.1,599 474.7,599 476.6,600.9 476.6,608.8 479.407,611.607 518.626,611.607 519.354,612.334 519.354,621.522 ; 474.8,620.1 480.2,620.1 ; 480.2,620.1 486.2,620.1 ; 486.2,620.1 491.9,620.1 ; 491.9,620.1 497.5,620.1 ; 497.5,620.1 503.2,620.1 ; 503.2,620.1 509.4,620.1 ; 509.4,620.1 514.7,620.1 ; 514.7,620.1 517.931,620.1 519.354,621.522
  Bottom Layer w0.508: v2(519.201,632.485) 519.201,636.499 520.014,637.311 v4(524.485,637.311)
  Bottom Layer w1.016: J29.3@297.032,566.6 297.143,566.711 297.143,570.226 299.45,572.532 307.661,572.532 310.006,574.877 310.006,576.133 312.439,578.567 315.22,578.567 317.652,581 v2(317.652,592.023) ; LED67.A@306.557,646.862 306.557,646.096 309.194,643.458 314.02,643.458 314.096,643.534 v2(314.096,644.246) ; v2(309.55,634.086) 311.023,632.612 v2@311.023,630.199 ; 314.096,643.458 317.271,643.458 318.948,645.135 ; LED68.A@317.195,646.887 318.948,645.135 ; 327.711,645.185 LED69.A@327.711,646.811 ; v2(331.038,569.138) 341.528,569.138 LED71.A@342.544,568.122 ; LED70.A@337.845,646.862 336.118,645.135 318.948,645.135 ; v2(345.186,631.927) 345.186,633.222 v2@346.316,634.352 ; v2(355.168,632.282) 355.168,633.265 356.845,634.942 373.931,634.942 v2(374.828,635.838)
  Bottom Layer w1.27: v2(302.489,589.719) 305.631,592.861 316.84,592.861 v2@317.652,592.049 ; v2(317.043,632.485) 318.287,632.485 320.624,630.149 v2(325.831,630.149) ; v2(317.652,592.023) v2@317.652,592.049 ; v2(318.618,616.534) 320.243,618.16 327.47,618.16 333.088,612.541 346.245,612.541 346.25,612.546 347.929,612.546 349.428,611.048 v2(349.428,607.365) v2@349.428,607.339 ; v2(337.668,595.046) 337.236,595.478 319.28,595.478 317.652,593.85 v2@317.652,592.049 ; LED71.A@342.544,568.122 344.266,569.844 352.933,569.844 ; LED72.A@352.857,568.249 352.857,569.768 352.933,569.844 ; v2(410.083,637.794) 410.808,638.519 v2(413.417,638.519) ; v2@416.128,619.684 416.585,620.141 v2(422.961,620.141) ; 419.71,620.192 419.71,623.087 419.354,623.443 414.376,623.443 413.309,624.51 413.309,634.594 v2(414.68,635.965) 440.969,635.965 v2(441.325,636.321) ; v3@530.8,569.7 v3(525.6,569.7) v3(520.5,569.7) v3(515.4,569.7) v3(510.1,569.7) v3(505,569.7) v3(500.1,569.7) v3(495,569.7) v3(490.1,569.7) v3(484.8,569.7) v3(479.6,569.7) v3(474.5,569.7) v3(469.3,569.7) v3(464.4,569.7) v3(459.2,569.7) v3(454.4,569.7) v3(449,569.7) v3(444,569.7) v3(438.8,569.7) v3(433.7,569.7) v3(428.5,569.7) v3(423.5,569.7) v3(418.2,569.7) v3(413.1,569.7) v3(408.2,569.7) v3(403,569.7) v3(397.9,569.7) v3(392.9,569.7) v3(387.8,569.7) v3(382.6,569.7) v3(377.5,569.7) v3(372.4,569.7) 372.256,569.844 352.933,569.844
  other v2: 416.052,619.608 423.164,635.991
+5V: C8.2 C11.2 C12.1 C25.1 C26.1 C27.1 C28.1 D1.A J3.1 J29.7 L1.1 R71.2 R167.2 U29.10 U68.8 U82.16 U98.3 U99.3 USB1.1 | length 424.5
  Top Layer w1.016: C25.1@272.669,639.267 271.424,638.023 271.424,631.419 272.136,630.707 U99.3@273.685,630.707 275.209,630.707 276.301,629.615 v2(276.301,628.777) ; D1.A@293.84,580.671 302.614,580.671 304.424,578.861 C11.2@304.424,578.283 304.424,577.998 303.608,577.183 303.574,577.183 302.9,576.509 ; C8.2@295.487,648.31 U68.8@292.329,648.31 288.696,648.31 287.401,647.014 287.401,641.643 v2(289.509,639.534) 290.171,638.872 296.404,638.872 297.028,639.496 R167.2@297.028,640.944 ; v2@300.457,569.577 297.723,569.577 296.545,570.755 296.545,574.37 298.171,575.996 302.387,575.996 302.9,576.509 ; J29.7@301.096,566.6 305.026,566.6 307.975,563.651 328.397,563.651 328.841,564.096 328.866,564.096 v2@328.993,564.223 ; C12.1@302.9,576 302.9,576.509 ; v2(347.269,575.31) 348.691,576.732 v7(348.691,582.066) ; J3.1@360,597 360,597.871 360.578,598.449 380.848,598.449 v2@382.93,596.367 ; v3(385.724,596.367) 385.724,596.739 388.247,599.262 403.123,599.262 ; 403.149,599.288 403.123,599.262 ; v3(405.486,599.262) 403.123,599.262 ; v7(409.88,598.933) 424.814,598.933 R71.2@426.618,597.129 ; U29.10@414.04,595.05 414.04,598.761 ; C26.1@425.298,592.43 425.298,595.732 R71.2@426.847,597.281
  Top Layer w1.27: v2@274.597,577.7 275.895,576.402 291.821,576.402 293.84,578.422 D1.A@293.84,580.671 ; v2@289.725,626.199 290.577,625.348 300.965,625.348 303.479,622.833 303.479,615.979 L1.1@306.21,613.248 309.98,617.018 ; U98.3@309.98,624.228 309.98,617.018 ; C28.1@314.35,619.368 314.35,617.601 313.767,617.018 309.98,617.018
  Bottom Layer w1.016: 276.301,627.329 v2(276.301,628.777) ; USB1.1@282.321,569.443 283.531,569.443 285.868,567.106 289.001,567.106 294.792,561.315 302.387,561.315 303.606,562.533 303.606,565.659 302.664,566.6 J29.7@301.096,566.6 301.096,568.905 v2(300.457,569.544) ; v2@329.057,564.49 329.057,571.703 332.664,575.31 v2(347.269,575.31) ; v7(348.691,582.066) 355.829,582.066 357.607,583.844 357.607,595.046 359.561,597 J3.1@360,597 ; v2(383.108,596.189) 383.286,596.367 v3(385.724,596.367) ; v3(405.486,599.262) 409.551,599.262 v7(409.88,598.933)
  Bottom Layer w1.27: v2@274.434,577.761 271.526,580.669 271.526,625.754 273.101,627.329 276.301,627.329 288.595,627.329 v2(289.71,626.214) 289.71,639.333 v2(289.509,639.534)
  other v2: 329.082,564.337 274.574,577.799